# Altium PCB PCB1.pcbdoc (part 2 of 2)
Units mil, origin at the board's own origin, x right, y up, seen from the top; angles counter-clockwise.
Board outline 4560 x 3575 mil, 4 copper layers (Top Layer, GND, Inner2, Bottom Layer); 136 components, 94 nets, 575 pads, 341 vias.
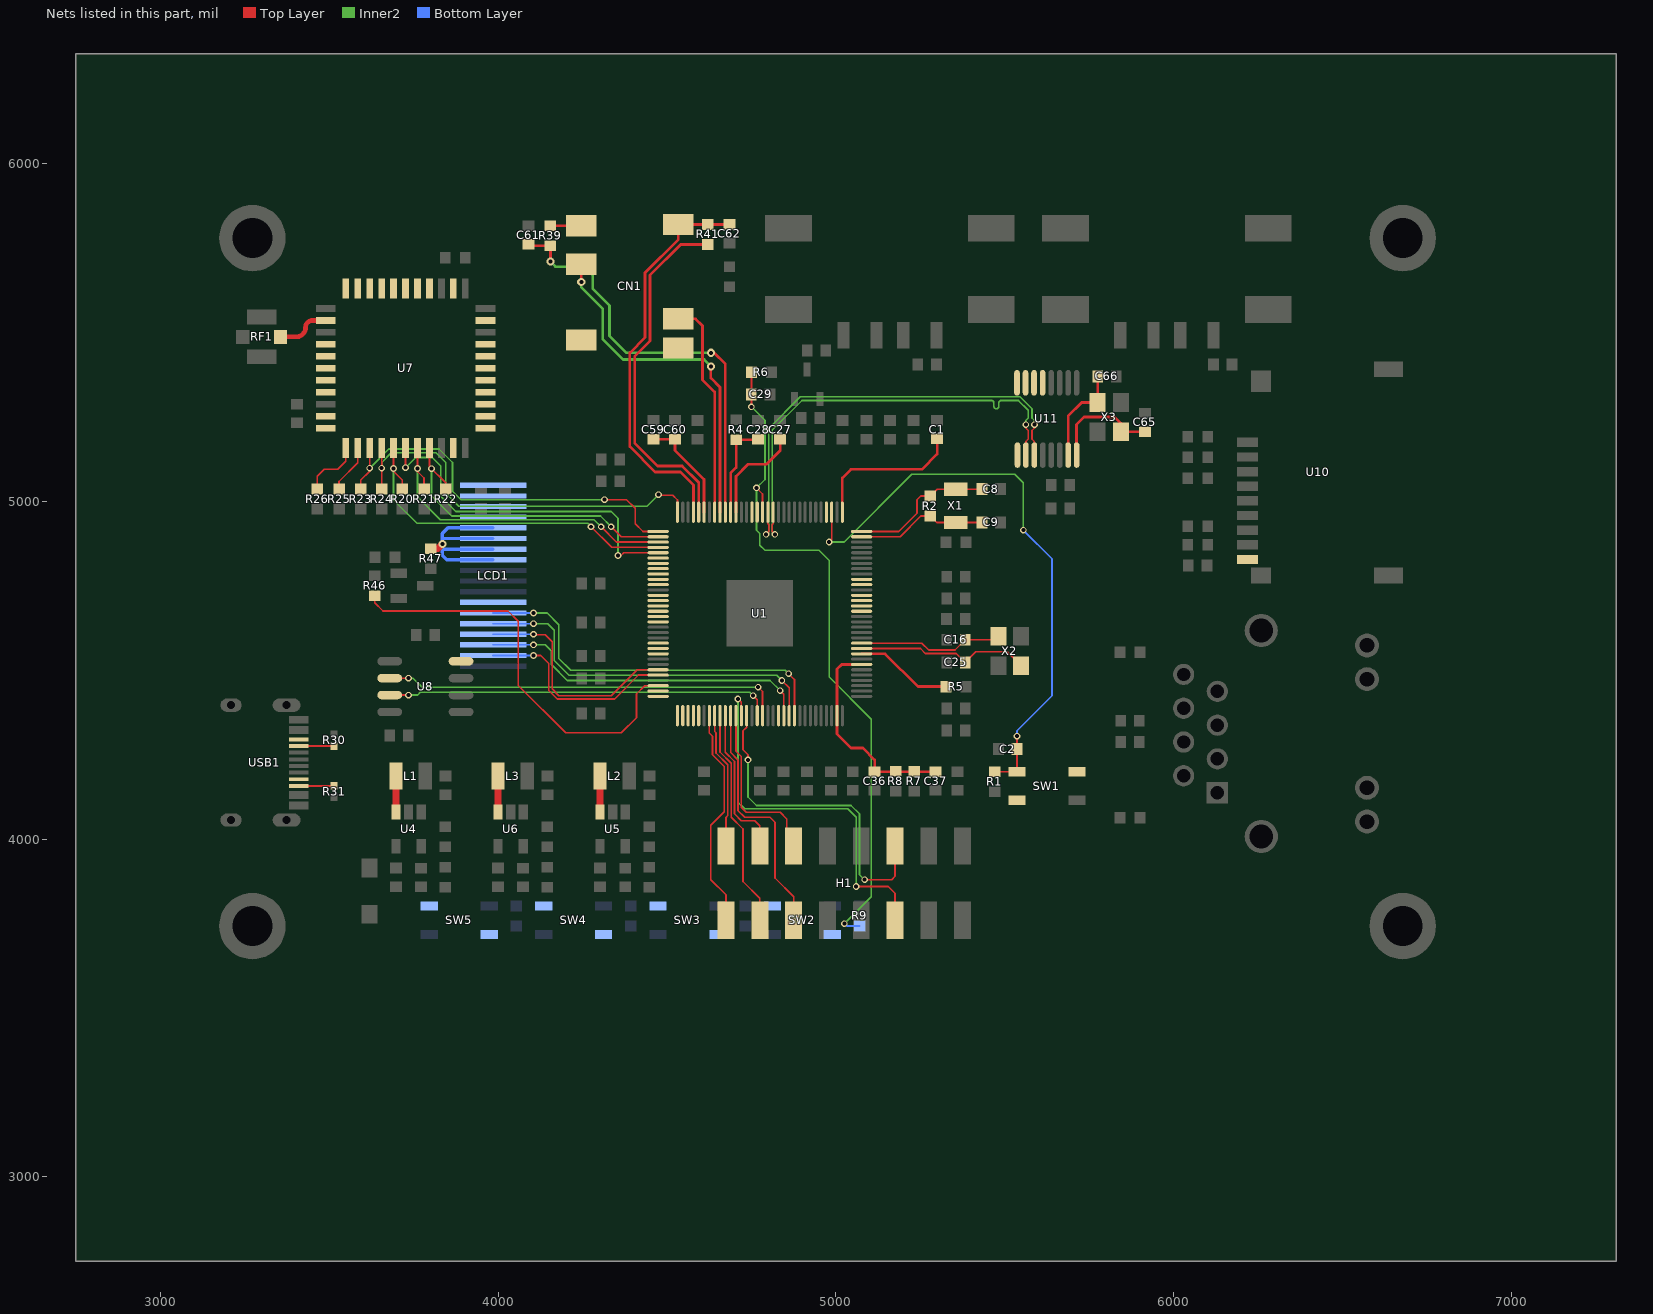
[diagram p4: the nets of this part, all layers, seen from the top]

## Via types
v1: diameter 24.02, hole 12.01, Top Layer to Bottom Layer, 200 vias
v2: diameter 24, hole 12, Top Layer to Bottom Layer, 60 vias
v3: diameter 19.68, hole 11.81, Top Layer to Bottom Layer, 41 vias
v4: diameter 19.7, hole 11.81, Top Layer to Bottom Layer, 31 vias
v5: diameter 27.56, hole 13.78, Top Layer to Bottom Layer, 9 vias

## Nets (pads, with @x,y where several pads share a name; then routed paths per layer and width w, separated by ;. In a path a pad name is that pad's centre, name@x,y a point inside that pad or via, vN(x,y) a via of type N, cw(c..) or ccw(c..) an arc to the next point about the centre after c; other vN are vias at no path point) (continued)
HBIAS: C61.2 R39.2 U1.119 | length 1271.9
  Top Layer w8: C61.2@4090,5761.02 4094.2,5756.82 R39.2@4155,5756.82 v1(4155,5710) ; v1(4630,5440) 4640,5440 4672.73,5407.27 U1.119@4672.73,4968.22
  Inner2 w8: v1(4155,5710) 4170,5695 4255,5695 4280,5670 4280,5630 4330,5580 4330,5490 4380,5440 v1(4630,5440)
HP_COM: C62.1 CN1.3 R41.1 U1.125 | length 1184.6
  Top Layer w8: U1.125@4578.24,4968.22 4578.24,5048.76 4540,5087.01 4465,5087.01 4390,5162.01 4390,5440 4435,5485 4435,5676.97 4533.7,5775.67 CN1.3@4533.7,5820.08 R41.1@4620,5820.08 C62.1@4685,5820.08
HP_COMFB: R41.2 U1.124 | length 1049.1
  Top Layer w8: U1.124@4593.99,4968.22 4593.99,5056.01 4545,5105 4472.01,5105 4405,5172.01 4405,5430 4450,5475 4450,5670 4540.76,5760.76 R41.2@4620,5760.76
HP_L: CN1.5 U1.121 | length 646.6
  Top Layer w8: CN1.5@4533.7,5540.55 4584.45,5540.55 4605,5520 4605,5360 4641.24,5323.76 U1.121@4641.24,4968.22
HP_R: CN1.4 U1.120 | length 1044.4
  Top Layer w8: v1(4246.3,5650) CN1.4@4246.3,5701.97 ; v1(4630,5400) 4630,5365 4656.98,5338.02 U1.120@4656.98,4968.22
  Inner2 w8: v1(4246.3,5650) 4246.3,5633.7 4310,5570 4310,5480 4370,5420 4610,5420 v1(4630,5400)
HS_MIC: CN1.2 R39.1 | length 91.3
  Top Layer w8: R39.1@4155,5816.14 CN1.2@4246.3,5816.14
HUB_XI: C65.2 U11.16 X3.1 | length 334.7
  Top Layer w8: U11.16@5712.66,5137.25 5712.66,5227.66 5735,5250 5825,5250 5843.92,5231.08 X3.1@5843.92,5206.27 C65.2@5915,5206.27
HUB_XO: C66.1 U11.15 X3.3 | length 296.5
  Top Layer w8: U11.15@5687.66,5137.25 5687.66,5252.66 5727.89,5292.89 X3.3@5775.02,5292.89 C66.1@5775.02,5370
KEYADC0: C29.1 R6.2 R9.1 U1.112 | length 2053.9
  Top Layer w5: v3(4750,5280) C29.1@4750,5317.01 R6.2@4750,5382.01 ; v3(4765,5040) 4782.97,5022.03 U1.112@4782.97,4968.22
  Inner2 w5: v3(4750,5280) 4790,5240 4790,5065 v3(4765,5040) 4765,4915 4775,4905 4775,4870 4790,4855 4950,4855 4980,4825 4980,4480 5105,4355 5105,3830 v3(5025,3750)
  Bottom Layer w5: v3(5025,3750) 5031.99,3743.01 R9.1@5070.16,3743.01
LEDK: LCD1.11 LCD1.12 LCD1.13 LCD1.14 R47.2 | length 718.8
  Top Layer w20: R47.2@3800,4859.66 3820.38,4859.66 v1(3835,4874.28)
  Bottom Layer w10: LCD1.11@3985,4827.24 3847.76,4827.24 3835,4840 3835,4858.99 ; LCD1.12@3985,4858.73 3835.26,4858.73 3835,4858.99 ; LCD1.13@3985,4890.23 3835.92,4890.23 3835,4889.31 ; LCD1.14@3985,4921.73 3851.73,4921.73 3835,4905 3835,4889.31 ; 3835,4858.99 v1(3835,4874.28) 3835,4889.31
LX: L1.2 U4.3 | length 106.4
  Top Layer w20: U4.3@3697.56,4080.62 L1.2@3697.56,4187.01
LX1: L2.2 U5.3 | length 106.4
  Top Layer w20: U5.3@4301.69,4080.62 L2.2@4301.69,4187.01
LX2: L3.2 U6.3 | length 106.4
  Top Layer w20: U6.3@3999.63,4080.62 L3.2@3999.63,4187.01
OTG1_CC1: R30.1 USB1.A5 | length 104.7
  Top Layer w5: USB1.A5@3409.96,4275.87 R30.1@3514.66,4275.87
OTG1_CC2: R31.1 USB1.B5 | length 104.7
  Top Layer w5: USB1.B5@3409.96,4157.77 R31.1@3514.66,4157.77
PB0: H1.1 U1.39 | length 659.7
  Top Layer w5: U1.39@4625.49,4365.8 4625.49,4314.51 4635,4305 4635,4250 4670,4215 4670,4081.48 4630,4041.48 4630,3880 4675,3835 H1.1@4675,3759.76
PB1: H1.2 U1.40 | length 403.7
  Top Layer w5: U1.40@4641.24,4365.8 4641.24,4318.76 4645,4315 4645,4255 4680,4220 4680,4070 4675,4065 H1.2@4675,3980.24
PB2: H1.3 U1.41 | length 654.9
  Top Layer w5: U1.41@4656.98,4365.8 4656.98,4258.02 4690,4225 4690,4065 4725,4030 4725,3875 4775,3825 H1.3@4775,3759.76
PB3: H1.4 U1.42 | length 451.4
  Top Layer w5: U1.42@4672.73,4365.8 4672.73,4257.27 4700,4230 4700,4075 4720,4055 4760,4055 4775,4040 H1.4@4775,3980.24
PB4: H1.5 U1.43 | length 727.2
  Top Layer w5: U1.43@4688.48,4365.8 4688.48,4256.52 4710,4235 4710,4085 4730,4065 4805,4065 4820,4050 4820,3885 4875,3830 H1.5@4875,3759.76
PB5: H1.6 U1.44 | length 514.9
  Top Layer w5: U1.44@4704.23,4365.8 4704.23,4260.77 4720,4245 4720,4095 4735,4080 4835,4080 4855,4060 4855,4000.24 H1.6@4875,3980.24
PB6: H1.11 U1.45 | length 1135.5
  Top Layer w5: v4(4710,4415) 4719.98,4405.02 U1.45@4719.98,4365.8 ; v3(5060,3860) 5155,3860 5175,3840 H1.11@5175,3759.76
  Inner2 w5: v4(4710,4415) 4710,4110 4730,4090 5035,4090 5060,4065 v3(5060,3860)
PB7: H1.12 U1.46 | length 987.8
  Top Layer w5: U1.46@4735.72,4365.8 4735.72,4331.8 4725,4321.07 4725,4265 4740,4250 v4(4740,4235) ; v3(5085,3880) 5165,3880 5175,3890 H1.12@5175,3980.24
  Inner2 w5: v4(4740,4235) 4740,4125 4765,4100 5045,4100 5070,4075 5070,3895 v3(5085,3880)
PE7: R46.1 U1.30 | length 1228.7
  Top Layer w5: R46.1@3635,4720.34 3635,4700 3659.49,4675.51 4029.49,4675.51 4060,4645 4060,4455 4200,4315 4365,4315 4410,4360 4410,4430 4434.41,4454.41 U1.30@4473.88,4454.41
PE8: LCD1.2 U1.28 | length 618.5
  Top Layer w5: v3(4105,4543.78) 4126.22,4543.78 4150,4520 4150,4440 4175,4415 4345,4415 4415.91,4485.91 U1.28@4473.88,4485.91
  Bottom Layer w5: LCD1.2@3985,4543.78 v3(4105,4543.78)
PE9: LCD1.4 U1.27 | length 679
  Top Layer w5: v3(4105,4606.77) 4105,4605 4140,4605 4160,4585 4160,4445 4180,4425 4335,4425 4411.65,4501.65 U1.27@4473.88,4501.65
  Bottom Layer w5: LCD1.4@3985,4606.77 v3(4105,4606.77)
RESET: C2.2 R1.1 SW1.1 U1.99 | length 1759.6
  Top Layer w5: v3(4980,4880) 4987.69,4887.69 U1.99@4987.69,4968.22 ; R1.1@5470,4199.57 SW1.1@5536.42,4199.57 C2.2@5536.42,4267.01 v3(5536.42,4305)
  Inner2 w5: v3(4980,4880) 5025,4880 5225,5080 5530,5080 5555,5055 v3(5555,4915)
  Bottom Layer w5: v3(5536.42,4305) 5536.42,4321.42 5640,4425 5640,4830 v3(5555,4915)
RTC_VIO: C1.1 U1.97 | length 456.2
  Top Layer w8: U1.97@5019.19,4968.22 5019.19,5069.19 5045,5095 5255,5095 5300,5140 C1.1@5300,5185.06
SPI_CS: LCD1.5 U1.54 | length 1090.6
  Top Layer w5: v3(4840,4470) 4861.71,4448.29 U1.54@4861.71,4365.8
  Inner2 w5: v3(4105,4638.26) 4146.74,4638.26 4166,4619 4166,4529 4210,4485 4825,4485 v3(4840,4470)
  Bottom Layer w5: LCD1.5@3985,4638.26 v3(4105,4638.26)
SPI_MOSI: LCD1.6 U1.55 | length 1139.8
  Top Layer w5: v3(4860,4490) 4877.46,4472.54 U1.55@4877.46,4365.8
  Inner2 w5: v3(4105,4669.76) 4145.24,4669.76 ; 4145,4670 4145.24,4669.76 ; v3(4860,4490) 4850,4500 4215,4500 4180,4535 4180,4635 4145.24,4669.76
  Bottom Layer w5: LCD1.6@3985,4669.76 v3(4105,4669.76)
SPI_SCK: LCD1.3 U1.53 | length 1008.5
  Top Layer w5: v3(4835,4440) 4845.96,4429.04 U1.53@4845.96,4365.8
  Inner2 w5: v3(4105,4575.27) 4139.73,4575.27 4157,4558 4157,4517.54 4204.54,4470 4805,4470 v3(4835,4440)
  Bottom Layer w5: LCD1.3@3985,4575.27 v3(4105,4575.27)
SVREF: C36.2 C37.2 R7.1 R8.2 U1.63 U1.71 | length 629.2
  Top Layer w8: U1.71@5076.31,4517.4 5017.4,4517.4 5003.44,4503.44 U1.63@5003.44,4365.8 5003.44,4311.56 5045,4270 5080,4270 5115,4235 C36.2@5115,4199.57 C37.2@5295,4199.57
SZQ: R5.1 U1.73 | length 289.9
  Top Layer w8: U1.73@5076.31,4548.9 5146.1,4548.9 5242.99,4452.01 R5.1@5326.07,4452.01
UART0_RX: U1.49 U8.6 | length 1191.6
  Top Layer w5: U8.6@3679.05,4476.67 v3(3735,4476.67) ; v4(4770,4450) 4782.97,4437.03 U1.49@4782.97,4365.8
  Inner2 w5: v3(3735,4476.67) 3748.33,4476.67 3775,4450 v4(4770,4450)
UART0_TX: U1.48 U8.7 | length 1147.8
  Top Layer w5: U8.7@3679.05,4426.67 v3(3735,4426.67) ; v3(4755,4425) 4767.22,4412.78 U1.48@4767.22,4365.8
  Inner2 w5: v3(3735,4426.67) 3761.67,4426.67 3770,4435 4745,4435 v3(4755,4425)
USB_N: U1.110 U11.10 | length 1365.4
  Top Layer w5: U1.110@4814.46,4968.22 4814.46,4934.22 4812.09,4931.85 4812.09,4910 v3(4819.43,4902.67) ; v4(5562.31,5227.2) 5562.31,5217.35 5569.66,5210 5569.66,5184.57 5562.66,5177.57 U11.10@5562.66,5137.25
  Inner2 w5: v3(4819.43,4902.67) 4812.09,4910 4812.09,5211.53 4899.56,5299 5460.03,5299 cw(c5460.03,5291.5) 5467.53,5291.5 5467.53,5281.81 ccw(c5475.03,5281.81) 5482.53,5281.81 5482.53,5291.5 cw(c5490.03,5291.5) 5490.03,5299 5540.44,5299 5569.66,5269.78 5569.66,5246.9 5562.31,5239.55 v4(5562.31,5227.2)
USB_P: U1.111 U11.11 | length 1365.4
  Top Layer w5: v3(4793.76,4902.67) 4801.09,4910 4801.09,4931.85 4798.72,4934.22 U1.111@4798.72,4968.22 ; U11.11@5587.66,5137.25 5587.66,5177.57 5580.66,5184.57 5580.66,5210 5588.01,5217.35 v4(5588.01,5227.2)
  Inner2 w5: v3(4793.76,4902.67) 4801.09,4910 4801.09,5216.09 4895,5310 5545,5310 5580.66,5274.34 5580.66,5246.9 5588.01,5239.55 v4(5588.01,5227.2)
VHP_BP: C59.2 C60.2 U1.123 | length 315.6
  Top Layer w8: C59.2@4460,5184.45 C60.2@4523.79,5184.45 4523.79,5151.21 4609.74,5065.26 U1.123@4609.74,4968.22
VRA1: C27.2 U1.117 | length 302.6
  Top Layer w8: U1.117@4704.23,4968.22 4704.23,5074.23 4740,5110 4795,5110 4835,5150 C27.2@4835,5184.45
VRA2: C28.2 R4.2 U1.118 | length 282
  Top Layer w8: U1.118@4688.48,4968.22 4688.48,5083.48 4705,5100 R4.2@4705,5182.65 4763.2,5182.65 C28.2@4765,5184.45
WIFI_SDC_CLK: U1.5 U7.17 | length 1058.7
  Top Layer w5: v3(3726,5100) U7.17@3726,5157.79 ; v3(4355,4840) 4363.78,4840 4371.89,4848.11 U1.5@4473.88,4848.11
  Inner2 w5: v3(3726,5100) 3756,5130 3805,5130 3830,5105 3830,5015 3875,4970 4335,4970 4355,4950 v3(4355,4840)
WIFI_SDC_CMD: R20.1 U1.4 U7.16 | length 1066.7
  Top Layer w5: U7.16@3690.57,5157.79 3690.57,5089.43 3716.67,5063.33 R20.1@3716.67,5036.67 ; v3(4275,4925) 4336.14,4863.86 U1.4@4473.88,4863.86
  Inner2 w5: v4(3690.57,5097.62) 3690.57,5004.43 3760,4935 4265,4935 v3(4275,4925)
WIFI_SDC_D0: R21.1 U1.3 U7.18 | length 981.1
  Top Layer w5: U7.18@3761.43,5157.79 3761.43,5088.57 3780.83,5069.17 R21.1@3780.83,5036.67 ; v3(4305,4925) 4350.39,4879.61 U1.3@4473.88,4879.61
  Inner2 w5: v4(3761.43,5097.62) 3761.43,5013.57 3829,4946 4284,4946 v3(4305,4925)
WIFI_SDC_D1: R22.1 U1.2 U7.19 | length 942.6
  Top Layer w5: U7.19@3796.87,5157.79 3796.87,5103.13 3845,5055 R22.1@3845,5036.67 ; v3(4335,4925) 4364.65,4895.35 U1.2@4473.88,4895.35
  Inner2 w5: v4(3802.82,5097.18) 3802.82,5017.18 3863,4957 4303,4957 v3(4335,4925)
WIFI_SDC_D2: R23.1 U1.1 U7.14 | length 1186.8
  Top Layer w5: R23.1@3593.33,5036.67 3593.33,5063.33 3619.7,5089.7 U7.14@3619.7,5157.79 ; v3(4315,5005) 4379.98,5005 4405.64,4979.35 4405.64,4934.36 4428.9,4911.1 U1.1@4473.88,4911.1
  Inner2 w5: v4(3619.7,5098.59) 3676.11,5155 3825,5155 3865,5115 3865,5030 3890,5005 v3(4315,5005)
WIFI_SDC_D3: R24.1 U1.128 U7.15 | length 1200.1
  Top Layer w5: R24.1@3655.13,5036.67 v4(3655.13,5098.59) U7.15@3655.13,5157.79 ; v3(4475,5020) 4476.67,5018.33 4516.67,5018.33 4531,5004 U1.128@4531,4968.22
  Inner2 w5: v4(3655.13,5098.59) 3655.13,5115.13 3684,5144 3816,5144 3845,5115 3845,5025 3884,4986 4441,4986 v3(4475,5020)
WL_H_WK: R25.1 U7.13 | length 143.9
  Top Layer w5: R25.1@3529.17,5036.67 3529.17,5059.17 3584.27,5114.27 U7.13@3584.27,5157.79
WL_LNA: RF1.4 U7.2 | length 161.5
  Top Layer w13.75: RF1.4@3356.1,5487.01 3402.01,5487.01 ccw(c3402.01,5515) 3430,5515 cw(c3450.74,5515) 3450.74,5535.74 U7.2@3489.78,5535.74
WL_REG: R26.1 U7.12 | length 179.3
  Top Layer w5: R26.1@3465,5036.67 3465,5075 3485,5095 3525,5095 3548.83,5118.83 U7.12@3548.83,5157.79
X24MIN: C16.1 U1.75 X2.3 | length 430.4
  Top Layer w5: U1.75@5076.31,4580.39 5254.61,4580.39 5275,4560 5352.51,4560 C16.1@5382.99,4590.47 5471.69,4590.47 X2.3@5481.53,4600.32
X24MOUT: C25.1 U1.74 X2.1 | length 519.3
  Top Layer w5: U1.74@5076.31,4564.65 5250.35,4564.65 5265,4550 5356.53,4550 C25.1@5382.99,4523.54 5414.44,4555 5507.16,4555 X2.1@5548.47,4513.7
X32KIN: C8.2 R2.2 U1.96 X1.2 | length 431.4
  Top Layer w5: U1.96@5076.31,4911.1 5186.1,4911.1 5240,4965 5240,5005 5250.94,5015.94 R2.2@5280,5015.94 5300.29,5036.22 X1.2@5355.01,5036.22 C8.2@5432.44,5036.22
X32KOUT: C9.2 R2.1 U1.95 X1.1 | length 389.3
  Top Layer w5: U1.95@5076.31,4895.35 5190.35,4895.35 5251.62,4956.62 R2.1@5280,4956.62 5298.82,4937.79 X1.1@5355.01,4937.79 C9.2@5432.44,4937.79
"": CN1.6 CN1.7 LCD1.7 LCD1.15 LCD1.16 LCD1.17 LCD1.18 SW1.2 SW1.3 SW2.2 SW2.3 SW3.2 SW3.3 SW4.2 SW4.3 SW5.2 SW5.3 U1.6 U1.7 U1.8 U1.9 U1.10 U1.11 U1.13 U1.14 U1.15 U1.16 U1.17 U1.18 U1.22 U1.23 U1.24 U1.31 U1.32 U1.33 U1.34 U1.35 U1.36 U1.37 U1.52 U1.81 U1.82 U1.83 U1.84 U1.86 U1.87 U1.100 U1.113 U1.114 U7.4 U7.5 U7.6 U7.7 U7.8 U7.10 U7.11 U7.21 U7.23 U7.24 U7.25 U7.26 U7.27 U7.28 U7.29 U7.30 U7.32 U7.35 U7.37 U7.38 U7.39 U7.40 U7.41 U7.42 U7.43 U7.44 U8.4 U10.CD U11.5 U11.6 U11.7 U11.8 U11.9 USB1.A8 USB1.B8

## Polygon pours and split planes (outlines as drawn)
GND on Top Layer (solid, remove dead copper, pour order 0): 3000,3150 6915,3150 6915,6075 3000,6075
GND on Inner2 (solid, remove dead copper, pour order 1): 3060,3000 7060,3000 7060,5985 3060,5985
GND on Bottom Layer (solid, remove dead copper, pour order 2): 3100,3195 6860,3195 6860,5945 3100,5945
GND on GND (split plane): 3233.43,3614.94 cw(c3189.26,3659.11) 3145.1,3703.27 3145.1,5818.58 cw(c3189.26,5862.75) 3233.43,5906.91 6717.68,5906.91 cw(c6761.84,5862.75) 6806,5818.58 6806,3703.27 cw(c6761.84,3659.11) 6717.68,3614.94 3233.43,3614.94
GND on GND (split plane): 3204.36,4396.77 3204.36,4426.67 3214.36,4426.67 3214.36,4396.77
GND on GND (split plane): 3214.36,4396.77 3214.36,4366.87 3204.36,4366.87 3204.36,4396.77
GND on GND (split plane): 3209.36,4401.77 3251.06,4401.77 3251.06,4391.77 3209.36,4391.77
GND on GND (split plane): 3167.66,4401.77 3209.36,4401.77 3209.36,4391.77 3167.66,4391.77
GND on GND (split plane): 3368.96,4056.57 3368.96,4086.47 3378.96,4086.47 3378.96,4056.57
GND on GND (split plane): 3378.96,4056.57 3378.96,4026.67 3368.96,4026.67 3368.96,4056.57
GND on GND (split plane): 3373.96,4061.57 3425.51,4061.57 3425.51,4051.57 3373.96,4051.57
GND on GND (split plane): 3322.41,4061.57 3373.96,4061.57 3373.96,4051.57 3322.41,4051.57
GND on GND (split plane): 3204.36,4056.57 3204.36,4086.47 3214.36,4086.47 3214.36,4056.57
GND on GND (split plane): 3214.36,4056.57 3214.36,4026.67 3204.36,4026.67 3204.36,4056.57
GND on GND (split plane): 3209.36,4061.57 3251.06,4061.57 3251.06,4051.57 3209.36,4051.57
GND on GND (split plane): 3167.66,4061.57 3209.36,4061.57 3209.36,4051.57 3167.66,4051.57
GND on GND (split plane): 3368.96,4396.77 3368.96,4426.67 3378.96,4426.67 3378.96,4396.77
GND on GND (split plane): 3378.96,4396.77 3378.96,4366.87 3368.96,4366.87 3368.96,4396.77
GND on GND (split plane): 3373.96,4401.77 3425.51,4401.77 3425.51,4391.77 3373.96,4391.77
GND on GND (split plane): 3322.41,4401.77 3373.96,4401.77 3373.96,4391.77 3322.41,4391.77
GND on GND (split plane): 6034.48,4487.74 6034.48,4446.05 6024.48,4446.05 6024.48,4487.74
GND on GND (split plane): 6024.48,4487.74 6024.48,4529.44 6034.48,4529.44 6034.48,4487.74
GND on GND (split plane): 5987.78,4492.74 6029.48,4492.74 6029.48,4482.74 5987.78,4482.74
GND on GND (split plane): 6029.48,4492.74 6071.18,4492.74 6071.18,4482.74 6029.48,4482.74
GND on GND (split plane): 6134.48,4437.74 6134.48,4396.05 6124.48,4396.05 6124.48,4437.74
GND on GND (split plane): 6124.48,4437.74 6124.48,4479.44 6134.48,4479.44 6134.48,4437.74
GND on GND (split plane): 6087.78,4442.74 6129.48,4442.74 6129.48,4432.74 6087.78,4432.74
GND on GND (split plane): 6129.48,4442.74 6171.18,4442.74 6171.18,4432.74 6129.48,4432.74
GND on GND (split plane): 6264.4,4617.86 6264.4,4558.45 6254.4,4558.45 6254.4,4617.86
GND on GND (split plane): 6254.4,4617.86 6254.4,4677.28 6264.4,4677.28 6264.4,4617.86
GND on GND (split plane): 6199.99,4622.86 6259.4,4622.86 6259.4,4612.86 6199.99,4612.86
GND on GND (split plane): 6259.4,4622.86 6318.81,4622.86 6318.81,4612.86 6259.4,4612.86
GND on GND (split plane): 6254.4,3948.61 6254.4,4008.02 6264.4,4008.02 6264.4,3948.61
GND on GND (split plane): 6264.4,4067.44 6264.4,4008.02 6254.4,4008.02 6254.4,4067.44
GND on GND (split plane): 6199.99,4013.02 6259.4,4013.02 6259.4,4003.02 6199.99,4003.02
GND on GND (split plane): 6259.4,4013.02 6318.81,4013.02 6318.81,4003.02 6259.4,4003.02

## Keep-outs
Top Layer:
  region net "": 3675,4145 3805,4145 3805,4230 3675,4230
  region net "": 3980,4145 4105,4145 4105,4230 3980,4230
  region net "": 4280,4145 4410,4145 4410,4230 4280,4230
Board Outline Layer:
  lines w10 net "": 3135,3703.27 ccw(c3233.43,3703.27) 3233.43,3604.84 6717.68,3604.84 ccw(c6717.68,3703.27) 6816.1,3703.27 6816.1,5818.58 ccw(c6717.68,5818.58) 6717.68,5917.01 3233.43,5917.01 ccw(c3233.43,5818.58) 3135,5818.58 3135,3703.27

## Other copper
Top Layer:
  drawing of 574 lines, arcs and shapes, not listed
Inner2:
  drawing of 63 lines, arcs and shapes, not listed
Bottom Layer:
  region net $1N5958: 4986.94,3781.05 4991.94,3781.05 cw(c5001.31,3781.05) 4995.69,3788.55 4983.19,3788.55 cw(c4977.56,3781.05)
  region net $1N5958: 5022.53,3799.82 5022.53,3804.82 cw(c5022.53,3814.2) 5015.03,3808.57 5015.03,3796.07 cw(c5022.53,3790.45)
  region net $1N5967: 4683.91,3799.82 4683.91,3804.82 cw(c4683.91,3814.2) 4676.41,3808.57 4676.41,3796.07 cw(c4683.91,3790.45)
  region net $1N15779: 4309.7,3782.2 4314.7,3782.2 cw(c4321.94,3782.2) 4318.45,3788.55 4305.95,3788.55 cw(c4302.46,3782.2)
  region net $1N15779: 4345.29,3799.82 4345.29,3804.82 cw(c4345.29,3814.2) 4337.79,3808.57 4337.79,3796.07 cw(c4345.29,3790.45)
  region net $1N5958: 5045.66,3804.82 5045.66,3799.82 cw(c5045.66,3790.45) 5053.16,3796.07 5053.16,3808.57 cw(c5045.66,3814.2)
  region net KEYADC0: 5045.66,3745.51 5045.66,3740.51 cw(c5045.66,3731.13) 5053.16,3736.76 5053.16,3749.26 cw(c5045.66,3754.88)
  region net $1N5967: 4707.04,3804.82 4707.04,3799.82 cw(c4707.04,3790.45) 4714.54,3796.07 4714.54,3808.57 cw(c4707.04,3814.2)
  region net $1N5958: 4756.05,3740.51 4756.05,3745.51 cw(c4756.05,3754.88) 4748.55,3749.26 4748.55,3736.76 cw(c4756.05,3731.13)
  region net $1N15779: 4368.42,3804.82 4368.42,3799.82 cw(c4368.42,3790.45) 4375.92,3796.07 4375.92,3808.57 cw(c4368.42,3814.2)
  region net $1N5967: 4417.44,3740.51 4417.44,3745.51 cw(c4417.44,3754.88) 4409.94,3749.26 4409.94,3736.76 cw(c4417.44,3731.13)
  region net $1N15784: 4029.8,3804.82 4029.8,3799.82 cw(c4029.8,3790.45) 4037.3,3796.07 4037.3,3808.57 cw(c4029.8,3814.2)
  region net $1N15779: 4078.82,3740.51 4078.82,3745.51 cw(c4078.82,3754.88) 4071.32,3749.26 4071.32,3736.76 cw(c4078.82,3731.13)
  region net $1N15784: 4006.67,3799.82 4006.67,3804.82 cw(c4006.67,3814.2) 3999.17,3808.57 3999.17,3796.07 cw(c4006.67,3790.45)
  region net SPI_SCK: 4090.93,4572.77 4090.93,4577.77 cw(c4090.93,4587.15) 4083.43,4581.52 4083.43,4569.02 cw(c4090.93,4563.4)
  region net LEDK: 3871.57,4926.73 3871.57,4916.73 cw(c3871.57,4876.15) 3886.57,4913.86 3886.57,4929.6 cw(c3871.57,4967.31)
  region net PE8: 4090.93,4541.28 4090.93,4546.28 cw(c4090.93,4555.65) 4083.43,4550.03 4083.43,4537.53 cw(c4090.93,4531.9)
  region net 3V3: 3871.57,4769.24 3871.57,4759.24 cw(c3871.57,4718.66) 3886.57,4756.37 3886.57,4772.11 cw(c3871.57,4809.82)
  region net SPI_CS: 4090.93,4635.76 4090.93,4640.76 cw(c4090.93,4650.14) 4083.43,4644.51 4083.43,4632.01 cw(c4090.93,4626.39)
  region net LEDK: 3871.57,4895.23 3871.57,4885.23 cw(c3871.57,4778.04) 3886.57,4884.18 3886.57,4896.28 cw(c3871.57,5002.42)
  region net PE9: 4090.93,4604.27 4090.93,4609.27 cw(c4090.93,4618.65) 4083.43,4613.02 4083.43,4600.52 cw(c4090.93,4594.9)
  region net 3V3: 3880.74,4800.74 3880.74,4790.74 cw(c3880.74,4774.07) 3886.57,4789.69 3886.57,4801.79 cw(c3880.74,4817.41)
  region net SPI_MOSI: 4090.93,4667.26 4090.93,4672.26 cw(c4090.93,4681.64) 4083.43,4676.01 4083.43,4663.51 cw(c4090.93,4657.89)
  region net LEDK: 3871.57,4863.73 3871.57,4853.73 cw(c3871.57,4746.54) 3886.57,4852.68 3886.57,4864.78 cw(c3871.57,4970.92)
  region net LEDK: 3871.57,4832.24 3871.57,4822.24 cw(c3871.57,4715.05) 3886.57,4821.19 3886.57,4833.29 cw(c3871.57,4939.43)
  region net 3V3: 6545.35,4093.29 6531.21,4079.15 6532.37,4077.91 6533.38,4076.68 6533.97,4075.86 6534.5,4075.05 6534.97,4074.23 6535.38,4073.42 6535.74,4072.6 6536.06,4071.78 6536.44,4070.55 6536.74,4069.3 6536.95,4068.04 6537.09,4066.76 6537.18,4065.01 6537.16,4061.85 6536.91,4053.84 6536.99,4050.48 6537.03,4049.89 6574.61,4087.48 6571.21,4087.59 6563.59,4087.37 6559.93,4087.31 6558.18,4087.38 6556.89,4087.5 6555.62,4087.69 6554.37,4087.95 6553.13,4088.31 6552.31,4088.6 6551.49,4088.93 6550.68,4089.32 6549.86,4089.76 6549.05,4090.26 6548.23,4090.82 6547,4091.78 6545.77,4092.89
  region net 3V3: 6531.21,4546.73 6545.35,4532.59 6546.59,4533.76 6547.82,4534.76 6548.64,4535.35 6549.45,4535.88 6550.27,4536.35 6551.08,4536.77 6551.9,4537.13 6552.72,4537.44 6553.96,4537.83 6555.2,4538.12 6556.47,4538.33 6557.75,4538.47 6559.49,4538.56 6562.65,4538.55 6570.66,4538.29 6574.03,4538.38 6574.61,4538.41 6537.03,4575.99 6536.91,4572.59 6537.13,4564.97 6537.19,4561.31 6537.12,4559.56 6537,4558.27 6536.81,4557.01 6536.55,4555.75 6536.2,4554.51 6535.91,4553.69 6535.57,4552.88 6535.18,4552.06 6534.74,4551.24 6534.24,4550.43 6533.68,4549.61 6532.73,4548.38 6531.61,4547.15
  region net 3V3: 6582.39,4622.01 6562.39,4622.01 6562.34,4620.31 6562.18,4618.73 6562.02,4617.74 6561.81,4616.78 6561.57,4615.88 6561.29,4615.01 6560.97,4614.17 6560.61,4613.37 6560.01,4612.23 6559.33,4611.14 6558.59,4610.09 6557.78,4609.09 6556.62,4607.79 6554.37,4605.57 6548.52,4600.08 6546.2,4597.65 6545.82,4597.21 6598.96,4597.21 6596.64,4599.69 6591.1,4604.93 6588.47,4607.47 6587.28,4608.76 6586.45,4609.76 6585.69,4610.78 6584.99,4611.86 6584.36,4612.98 6583.99,4613.77 6583.65,4614.59 6583.35,4615.44 6583.08,4616.33 6582.86,4617.25 6582.68,4618.23 6582.49,4619.77 6582.4,4621.43
  region net 3V3: 3890,4158.66 3900,4158.66 3900.02,4159.23 3900.09,4159.8 3900.2,4160.37 3900.34,4160.93 3900.52,4161.49 3900.98,4162.6 3901.54,4163.68 3902.19,4164.72 3902.89,4165.7 3904,4167.06 3886,4167.06 3887.11,4165.7 3887.81,4164.72 3888.46,4163.68 3889.02,4162.6 3889.48,4161.49 3889.66,4160.93 3889.8,4160.37 3889.91,4159.8 3889.98,4159.23
  region net 3V3: 3898.54,3866.46 3891.46,3873.54 3891.06,3873.17 3890.66,3872.86 3890.26,3872.61 3889.86,3872.42 3889.45,3872.26 3889.04,3872.15 3888.62,3872.07 3888.19,3872.03 3887.29,3871.99 3884.8,3872 3884.25,3871.98 3896.98,3859.25 3897.01,3860.34 3897,3862.75 3897.03,3863.19 3897.07,3863.62 3897.15,3864.04 3897.26,3864.45 3897.42,3864.86 3897.61,3865.26 3897.86,3865.66 3898.17,3866.06
  region net 1V2: 4193.02,4171.92 4200.09,4178.99 4199.7,4179.41 4199.35,4179.86 4199.02,4180.34 4198.73,4180.84 4198.46,4181.36 4198,4182.47 4197.63,4183.63 4197.35,4184.82 4197.15,4186.01 4196.98,4187.76 4184.25,4175.03 4186,4174.86 4187.19,4174.66 4188.38,4174.38 4189.54,4174.01 4190.64,4173.55 4191.17,4173.28 4191.67,4172.98 4192.15,4172.66 4192.6,4172.31
  region net 1V2: 4203.54,3866.46 4196.46,3873.54 4196.06,3873.17 4195.66,3872.86 4195.26,3872.61 4194.86,3872.42 4194.45,3872.26 4194.04,3872.15 4193.62,3872.07 4193.19,3872.03 4192.29,3871.99 4189.8,3872 4189.25,3871.98 4201.98,3859.25 4202.01,3860.34 4202,3862.75 4202.03,3863.19 4202.07,3863.62 4202.15,3864.04 4202.26,3864.45 4202.42,3864.86 4202.61,3865.26 4202.86,3865.66 4203.17,3866.06
  region net 1V8: 4498.02,4171.92 4505.09,4178.99 4504.7,4179.41 4504.35,4179.86 4504.02,4180.34 4503.73,4180.84 4503.46,4181.36 4503,4182.47 4502.63,4183.63 4502.35,4184.82 4502.15,4186.01 4501.98,4187.76 4489.25,4175.03 4491,4174.86 4492.19,4174.66 4493.38,4174.38 4494.54,4174.01 4495.64,4173.55 4496.17,4173.28 4496.67,4172.98 4497.15,4172.66 4497.6,4172.31
  region net 1V8: 4505.09,3868.02 4498.02,3875.09 4497.6,3874.7 4497.15,3874.35 4496.67,3874.02 4496.17,3873.73 4495.64,3873.46 4494.54,3873 4493.38,3872.63 4492.19,3872.35 4491,3872.15 4489.25,3871.98 4501.98,3859.25 4502.15,3861 4502.35,3862.19 4502.63,3863.38 4503,3864.54 4503.46,3865.64 4503.73,3866.17 4504.02,3866.67 4504.35,3867.15 4504.7,3867.6
  region net 3V3: 4405,5040.95 4425,5040.95 4424.97,5041.76 4424.9,5042.52 4424.67,5043.88 4424.26,5045.65 4424.16,5046.19 4424.09,5046.72 4424.07,5047.24 4424.1,5047.76 4424.21,5048.29 4424.39,5048.83 4424.67,5049.39 4425.05,5049.98 4425.55,5050.59 4404.88,5050.59 4405.4,5049.95 4405.79,5049.35 4406.06,5048.78 4406.23,5048.25 4406.3,5047.73 4406.3,5047.23 4406.24,5046.72 4406.12,5046.22 4405.61,5044.57 4405.26,5043.3 4405.12,5042.58 4405.03,5041.8
  region net 3V3: 4425,5078.47 4405,5078.47 4405.03,5077.61 4405.12,5076.83 4405.26,5076.12 4405.61,5074.84 4406.12,5073.2 4406.24,5072.69 4406.3,5072.19 4406.3,5071.68 4406.23,5071.16 4406.06,5070.63 4405.79,5070.06 4405.4,5069.46 4404.88,5068.82 4425.55,5068.82 4425.05,5069.44 4424.67,5070.02 4424.39,5070.58 4424.21,5071.12 4424.1,5071.65 4424.07,5072.17 4424.09,5072.69 4424.16,5073.22 4424.53,5074.91 4424.8,5076.19 4424.9,5076.9 4424.97,5077.65
  region net 3V0: 5001.24,4600.14 5001.24,4592.14 5002.1,4592.11 5002.88,4592 5003.6,4591.83 5004.26,4591.6 5004.88,4591.31 5005.45,4590.97 5005.99,4590.59 5006.51,4590.16 5007.52,4589.2 5009.64,4586.99 5010.89,4585.81 5010.89,4606.48 5009.64,4605.29 5007.52,4603.08 5006.51,4602.12 5005.99,4601.7 5005.45,4601.31 5004.88,4600.97 5004.26,4600.69 5003.6,4600.45 5002.88,4600.28 5002.1,4600.18
  region net 3V0: 4741,4881.24 4749,4881.24 4749.04,4882.1 4749.14,4882.88 4749.31,4883.6 4749.54,4884.26 4749.83,4884.88 4750.17,4885.45 4750.55,4885.99 4750.98,4886.51 4751.94,4887.52 4754.15,4889.64 4755.33,4890.89 4734.67,4890.89 4735.85,4889.64 4738.06,4887.52 4739.02,4886.51 4739.45,4885.99 4739.83,4885.45 4740.17,4884.88 4740.46,4884.26 4740.69,4883.6 4740.86,4882.88 4740.96,4882.1
  region net 3V3: 4254.88,5085 4254.88,5105 4254.05,5104.97 4253.28,5104.89 4252.57,5104.77 4251.29,5104.46 4249.63,5104.02 4249.11,5103.93 4248.6,5103.88 4248.08,5103.9 4247.56,5103.99 4247.02,5104.17 4246.46,5104.44 4245.87,5104.83 4245.24,5105.33 4245.24,5084.67 4245.87,5085.17 4246.46,5085.56 4247.02,5085.83 4247.56,5086.01 4248.08,5086.1 4248.6,5086.12 4249.11,5086.07 4249.63,5085.98 4251.29,5085.54 4252.57,5085.23 4253.28,5085.11 4254.05,5085.03
  region net 1V2: 4341.24,5185 4341.24,5165 4342.07,5165.03 4342.84,5165.11 4343.55,5165.23 4344.83,5165.54 4346.5,5165.98 4347.02,5166.07 4347.53,5166.12 4348.04,5166.1 4348.56,5166.01 4349.1,5165.83 4349.66,5165.56 4350.26,5165.17 4350.89,5164.67 4350.89,5185.33 4350.26,5184.83 4349.66,5184.44 4349.1,5184.17 4348.56,5183.99 4348.04,5183.9 4347.53,5183.88 4347.02,5183.93 4346.5,5184.02 4344.83,5184.46 4343.55,5184.77 4342.84,5184.89 4342.07,5184.97
  region net 3V3: 5288.81,4795.34 5274.66,4781.19 5275.27,4780.63 5275.88,4780.14 5276.46,4779.72 5277.58,4779.04 5279.08,4778.17 5279.51,4777.87 5279.9,4777.54 5280.25,4777.16 5280.56,4776.73 5280.81,4776.22 5281.02,4775.63 5281.16,4774.94 5281.25,4774.14 5295.86,4788.75 5295.06,4788.84 5294.37,4788.98 5293.78,4789.19 5293.27,4789.44 5292.84,4789.75 5292.46,4790.1 5292.13,4790.49 5291.83,4790.92 5290.96,4792.42 5290.28,4793.54 5289.86,4794.12 5289.37,4794.73
  region net 1V2: 5026.24,4245 5026.24,4225 5027.07,4225.03 5027.84,4225.11 5028.55,4225.23 5029.83,4225.54 5031.5,4225.98 5032.02,4226.07 5032.53,4226.12 5033.04,4226.1 5033.56,4226.01 5034.1,4225.83 5034.66,4225.56 5035.26,4225.17 5035.89,4224.67 5035.89,4245.33 5035.26,4244.83 5034.66,4244.44 5034.1,4244.17 5033.56,4243.99 5033.04,4243.9 5032.53,4243.88 5032.02,4243.93 5031.5,4244.02 5029.83,4244.46 5028.55,4244.77 5027.84,4244.89 5027.07,4244.97
  region net 1V2: 5063.76,4225 5063.76,4245 5062.93,4244.97 5062.16,4244.89 5061.45,4244.77 5060.17,4244.46 5058.5,4244.02 5057.98,4243.93 5057.47,4243.88 5056.96,4243.9 5056.44,4243.99 5055.9,4244.17 5055.34,4244.44 5054.74,4244.83 5054.11,4245.33 5054.11,4224.67 5054.74,4225.17 5055.34,4225.56 5055.9,4225.83 5056.44,4226.01 5056.96,4226.1 5057.47,4226.12 5057.98,4226.07 5058.5,4225.98 5060.17,4225.54 5061.45,4225.23 5062.16,4225.11 5062.93,4225.03
  region net 1V2: 4731.81,4305 4731.81,4285 4732.65,4285.03 4733.42,4285.11 4734.13,4285.23 4735.4,4285.54 4737.07,4285.98 4737.59,4286.07 4738.1,4286.12 4738.61,4286.1 4739.14,4286.01 4739.68,4285.83 4740.24,4285.56 4740.83,4285.17 4741.46,4284.67 4741.46,4305.33 4740.83,4304.83 4740.24,4304.44 4739.68,4304.17 4739.14,4303.99 4738.61,4303.9 4738.1,4303.88 4737.59,4303.93 4737.07,4304.02 4735.4,4304.46 4734.13,4304.77 4733.42,4304.89 4732.65,4304.97
  region net 1V2: 4769.33,4285 4769.33,4305 4768.5,4304.97 4767.73,4304.89 4767.02,4304.77 4765.74,4304.46 4764.08,4304.02 4763.56,4303.93 4763.04,4303.88 4762.53,4303.9 4762.01,4303.99 4761.47,4304.17 4760.91,4304.44 4760.32,4304.83 4759.69,4305.33 4759.69,4284.67 4760.32,4285.17 4760.91,4285.56 4761.47,4285.83 4762.01,4286.01 4762.53,4286.1 4763.04,4286.12 4763.56,4286.07 4764.08,4285.98 4765.74,4285.54 4767.02,4285.23 4767.73,4285.11 4768.5,4285.03
  region net 1V2: 4628.76,4285 4628.76,4305 4627.3,4304.94 4624.72,4304.7 4623.55,4304.63 4622.99,4304.64 4622.44,4304.7 4621.89,4304.8 4621.34,4304.95 4620.79,4305.17 4620.24,4305.46 4619.68,4305.83 4619.11,4306.29 4619.11,4285.63 4619.98,4286.09 4621.08,4286.25 4622.34,4286.18 4623.69,4285.95 4627.68,4285.1
  region net 1V2: 4591.24,4305 4591.24,4285 4591.75,4285.03 4592.93,4285.2 4596.31,4285.95 4597.66,4286.18 4598.31,4286.24 4598.92,4286.25 4599.5,4286.2 4600.02,4286.09 4600.49,4285.9 4600.89,4285.63 4600.89,4306.29 4600.32,4305.83 4599.76,4305.46 4599.21,4305.17 4598.66,4304.95 4598.11,4304.8 4597.56,4304.7 4597.01,4304.64 4596.45,4304.63 4595.28,4304.7 4592.7,4304.94
  region net SPI_MOSI: 4091.6,4672.26 4091.6,4667.26 4092.26,4667.23 4092.84,4667.15 4093.37,4667.02 4093.84,4666.84 4094.28,4666.62 4094.67,4666.36 4095.04,4666.06 4095.39,4665.73 4096.07,4665 4097.55,4663.29 4098.49,4662.38 4098.49,4677.14 4097.55,4676.23 4096.07,4674.52 4095.39,4673.79 4095.04,4673.46 4094.67,4673.16 4094.28,4672.9 4093.84,4672.68 4093.37,4672.5 4092.84,4672.37 4092.26,4672.29
  region net SPI_CS: 4091.6,4640.76 4091.6,4635.76 4092.26,4635.73 4092.84,4635.65 4093.37,4635.52 4093.84,4635.34 4094.28,4635.12 4094.67,4634.86 4095.04,4634.56 4095.39,4634.23 4096.07,4633.5 4097.55,4631.79 4098.49,4630.88 4098.49,4645.64 4097.55,4644.73 4096.07,4643.02 4095.39,4642.29 4095.04,4641.96 4094.67,4641.66 4094.28,4641.4 4093.84,4641.18 4093.37,4641 4092.84,4640.87 4092.26,4640.79
  region net SPI_SCK: 4091.6,4577.77 4091.6,4572.77 4092.26,4572.74 4092.84,4572.66 4093.37,4572.53 4093.84,4572.35 4094.28,4572.13 4094.67,4571.87 4095.04,4571.57 4095.39,4571.24 4096.07,4570.51 4097.55,4568.8 4098.49,4567.89 4098.49,4582.65 4097.55,4581.74 4096.07,4580.03 4095.39,4579.3 4095.04,4578.97 4094.67,4578.67 4094.28,4578.41 4093.84,4578.19 4093.37,4578.01 4092.84,4577.88 4092.26,4577.8
  region net PE8: 4091.6,4546.28 4091.6,4541.28 4092.26,4541.25 4092.84,4541.17 4093.37,4541.04 4093.84,4540.86 4094.28,4540.64 4094.67,4540.38 4095.04,4540.08 4095.39,4539.75 4096.07,4539.02 4097.55,4537.31 4098.49,4536.4 4098.49,4551.16 4097.55,4550.25 4096.07,4548.54 4095.39,4547.81 4095.04,4547.48 4094.67,4547.18 4094.28,4546.92 4093.84,4546.7 4093.37,4546.52 4092.84,4546.39 4092.26,4546.31
  region net PE9: 4091.6,4609.27 4091.6,4604.27 4092.26,4604.24 4092.84,4604.16 4093.37,4604.03 4093.84,4603.85 4094.28,4603.63 4094.67,4603.37 4095.04,4603.07 4095.39,4602.74 4096.07,4602.01 4097.55,4600.3 4098.49,4599.39 4098.49,4614.15 4097.55,4613.24 4096.07,4611.53 4095.39,4610.8 4095.04,4610.47 4094.67,4610.17 4094.28,4609.91 4093.84,4609.69 4093.37,4609.51 4092.84,4609.38 4092.26,4609.3
  region net 3V3: 3820,4671.35 3810,4671.35 3809.98,4670.78 3809.91,4670.21 3809.8,4669.64 3809.66,4669.08 3809.47,4668.51 3809.02,4667.41 3808.46,4666.33 3807.81,4665.29 3807.11,4664.3 3805.99,4662.94 3824.01,4662.94 3822.89,4664.3 3822.19,4665.29 3821.54,4666.33 3820.98,4667.41 3820.53,4668.51 3820.34,4669.08 3820.2,4669.64 3820.09,4670.21 3820.02,4670.78
  region net LEDK: 3830,4858.99 3840,4858.99 3840.02,4859.55 3840.09,4860.08 3840.2,4860.6 3840.34,4861.1 3840.53,4861.58 3840.74,4862.05 3840.98,4862.5 3841.54,4863.39 3842.19,4864.24 3844.01,4866.34 3825.99,4866.34 3827.81,4864.24 3828.46,4863.39 3829.02,4862.5 3829.26,4862.05 3829.47,4861.58 3829.66,4861.1 3829.8,4860.6 3829.91,4860.08 3829.98,4859.55
  region net LEDK: 3840,4889.31 3830,4889.31 3829.98,4888.75 3829.91,4888.23 3829.8,4887.72 3829.66,4887.24 3829.47,4886.78 3829.26,4886.34 3829.02,4885.9 3828.46,4885.07 3827.81,4884.26 3825.99,4882.23 3844.01,4882.23 3842.19,4884.26 3841.54,4885.07 3840.98,4885.9 3840.74,4886.34 3840.53,4886.78 3840.34,4887.24 3840.2,4887.72 3840.09,4888.23 3840.02,4888.75
  region net RESET: 5538.92,4318.4 5533.92,4318.4 5533.89,4317.74 5533.81,4317.16 5533.68,4316.63 5533.5,4316.16 5533.28,4315.72 5533.02,4315.33 5532.72,4314.96 5532.39,4314.61 5531.65,4313.93 5529.95,4312.45 5529.04,4311.51 5543.8,4311.51 5542.89,4312.45 5541.18,4313.93 5540.44,4314.61 5540.12,4314.96 5539.82,4315.33 5539.56,4315.72 5539.34,4316.16 5539.16,4316.63 5539.03,4317.16 5538.95,4317.74
  region net RESET: 5562.71,4903.76 5566.24,4907.29 5565.8,4907.78 5565.44,4908.25 5565.16,4908.71 5564.95,4909.18 5564.8,4909.64 5564.71,4910.1 5564.66,4910.57 5564.64,4911.05 5564.69,4912.05 5564.84,4914.31 5564.82,4915.62 5554.38,4905.18 5555.69,4905.16 5557.95,4905.31 5558.95,4905.36 5559.43,4905.34 5559.9,4905.29 5560.36,4905.2 5560.82,4905.05 5561.29,4904.84 5561.75,4904.56 5562.22,4904.2
  region net KEYADC0: 5030.23,3741.24 5033.76,3744.77 5033.44,3745.32 5033.39,3745.98 5033.56,3746.71 5034.19,3748.3 5034.52,3749.11 5034.76,3749.89 5034.82,3750.62 5024.38,3740.18 5025.11,3740.24 5025.89,3740.48 5027.51,3741.15 5028.29,3741.44 5029.02,3741.61 5029.68,3741.56
  region net 1V8: 5307.87,4295 5297.87,4275 ccw(c5297.87,4343.17) 5317.87,4278 5320.72,4292 ccw(c5307.87,4265.94)
  region net 3V3: 3813.74,4242.06 3814.67,4242.03 3815.61,4241.94 3816.54,4241.8 3817.47,4241.61 3818.39,4241.36 3819.3,4241.07 3821.08,4240.34 3822.81,4239.43 3824.46,4238.37 3826.02,4237.15 3827.49,4235.81 3828.83,4234.34 3830.05,4232.78 3831.11,4231.13 3832.02,4229.4 3832.75,4227.62 3833.04,4226.71 3833.29,4225.79 3833.48,4224.86 3833.62,4223.93 3833.71,4222.99 3833.74,4222.06 3853.74,4222.06 3853.8,4223.93 3853.97,4225.92 3854.37,4228.7 3855.13,4232.37 3856.14,4236.18 3857.65,4240.86 3859.45,4245.55 3861.49,4250.14 3863.73,4254.51 3865.71,4257.92 3867.77,4261.05 3869.46,4263.3 3870.74,4264.83 3872.02,4266.2 3857.88,4280.34 3856.51,4279.06 3854.99,4277.78 3852.73,4276.09 3849.6,4274.03 3846.19,4272.05 3841.82,4269.81 3837.23,4267.77 3832.54,4265.97 3827.86,4264.46 3824.05,4263.45 3820.38,4262.69 3817.6,4262.29 3815.61,4262.12 3813.74,4262.06
  region net 1V8: 4457.86,4250.8 4437.86,4240.8 ccw(c4466.92,4240.8) 4440.86,4227.94 4454.86,4230.8 ccw(c4389.7,4250.8)
  region net 3V3: 4321.72,4350.86 4335.86,4336.72 4342.93,4357.93 4360,4395
  region net 3V3: 4785,5175 4805,5175 ccw(c4897.5,5175) 4810,5145 4780,5145 ccw(c4692.5,5175)
  region net 3V3: 4429.14,5123.28 4427.77,5122 4426.25,5120.72 4423.99,5119.03 4420.87,5116.97 4417.46,5114.99 4413.08,5112.76 4408.49,5110.71 4403.8,5108.91 4399.13,5107.4 4395.31,5106.39 4391.65,5105.63 4388.86,5105.23 4386.88,5105.06 4385,5105 4385,5085 4385.94,5084.97 4386.87,5084.89 4387.8,5084.74 4388.73,5084.55 4389.65,5084.31 4390.56,5084.01 4392.34,5083.28 4394.07,5082.38 4395.72,5081.31 4397.29,5080.1 4398.75,5078.75 4400.1,5077.29 4401.31,5075.72 4402.38,5074.07 4403.28,5072.34 4404.01,5070.56 4404.31,5069.65 4404.55,5068.73 4404.74,5067.8 4404.89,5066.87 4404.97,5065.94 4405,5065 4425,5065 4425.06,5066.88 4425.23,5068.86 4425.63,5071.65 4426.39,5075.31 4427.4,5079.13 4428.91,5083.8 4430.71,5088.49 4432.76,5093.08 4434.99,5097.46 4436.97,5100.87 4439.03,5103.99 4440.72,5106.25 4442,5107.77 4443.28,5109.14
  region net 3V3: 4405,5040.95 4425,5040.95 4424.97,5041.76 4424.9,5042.52 4424.67,5043.88 4424.26,5045.65 4424.16,5046.19 4424.09,5046.72 4424.07,5047.24 4424.1,5047.76 4424.21,5048.29 4424.39,5048.83 4424.67,5049.39 4425.05,5049.98 4425.55,5050.59 4404.88,5050.59 4405.4,5049.95 4405.79,5049.35 4406.06,5048.78 4406.23,5048.25 4406.3,5047.73 4406.3,5047.23 4406.24,5046.72 4406.12,5046.22 4405.61,5044.57 4405.26,5043.3 4405.12,5042.58 4405.03,5041.8
  region net 3V3: 4425,5078.47 4405,5078.47 4405.03,5077.61 4405.12,5076.83 4405.26,5076.12 4405.61,5074.84 4406.12,5073.2 4406.24,5072.69 4406.3,5072.19 4406.3,5071.68 4406.23,5071.16 4406.06,5070.63 4405.79,5070.06 4405.4,5069.46 4404.88,5068.82 4425.55,5068.82 4425.05,5069.44 4424.67,5070.02 4424.39,5070.58 4424.21,5071.12 4424.1,5071.65 4424.07,5072.17 4424.09,5072.69 4424.16,5073.22 4424.53,5074.91 4424.8,5076.19 4424.9,5076.9 4424.97,5077.65
  region net 1V2: 4900.86,4263.28 4886.72,4249.14 4907.93,4242.07 4945,4225
  region net +5V: 6095.33,5447.43 6084.93,5437.36 6080.23,5433.28 6076.08,5430.06 6072.52,5427.63 6069.6,5425.87 6066.59,5424.3 6064.28,5423.27 6061.92,5422.36 6059.51,5421.58 6057.03,5420.95 6054.5,5420.47 6051.9,5420.16 6049.23,5420.01 6048.33,5420 6048.33,5390 6059.12,5405 6116.55,5426.21
  region net 1V2: 4175.8,4241.33 4165.8,4261.33 ccw(c4165.8,4232.27) 4152.94,4258.33 4155.8,4244.33 ccw(c4175.8,4309.49)
  region net 1V2: 4628.76,4285 4628.76,4305 4627.3,4304.94 4624.72,4304.7 4623.55,4304.63 4622.99,4304.64 4622.44,4304.7 4621.89,4304.8 4621.34,4304.95 4620.79,4305.17 4620.24,4305.46 4619.68,4305.83 4619.11,4306.29 4619.11,4285.63 4619.98,4286.09 4621.08,4286.25 4622.34,4286.18 4623.69,4285.95 4627.68,4285.1
  region net 1V2: 4591.24,4305 4591.24,4285 4591.75,4285.03 4592.93,4285.2 4596.31,4285.95 4597.66,4286.18 4598.31,4286.24 4598.92,4286.25 4599.5,4286.2 4600.02,4286.09 4600.49,4285.9 4600.89,4285.63 4600.89,4306.29 4600.32,4305.83 4599.76,4305.46 4599.21,4305.17 4598.66,4304.95 4598.11,4304.8 4597.56,4304.7 4597.01,4304.64 4596.45,4304.63 4595.28,4304.7 4592.7,4304.94
  region net 3V3: 5946.72,4918.47 5948,4917.1 5949.28,4915.57 5950.97,4913.32 5953.03,4910.19 5955.01,4906.78 5957.24,4902.4 5959.29,4897.82 5961.09,4893.13 5962.6,4888.45 5963.61,4884.64 5964.37,4880.97 5964.77,4878.18 5964.94,4876.2 5965,4874.32 5965,4938.47 5964.98,4937.78 5964.84,4936.38 5964.71,4935.68 5964.55,4935.01 5964.36,4934.37 5964.13,4933.78 5963.88,4933.24 5963.6,4932.78 5963.28,4932.4 5962.94,4932.12 5962.58,4931.95 5962.18,4931.9 5961.76,4931.99 5961.32,4932.22 5960.86,4932.61
  region net 3V3: 5309.59,5080 5307.71,5080.06 5305.73,5080.23 5302.94,5080.63 5299.28,5081.39 5295.46,5082.4 5290.79,5083.91 5286.1,5085.71 5281.51,5087.76 5277.13,5089.99 5273.72,5091.97 5270.6,5094.03 5268.34,5095.72 5266.82,5097 5265.45,5098.28 5251.31,5084.14 5252.59,5082.77 5253.87,5081.25 5255.56,5078.99 5257.62,5075.87 5259.6,5072.46 5261.83,5068.08 5263.88,5063.49 5265.68,5058.8 5267.19,5054.13 5268.2,5050.31 5268.95,5046.65 5269.36,5043.86 5269.53,5041.88 5269.59,5040 5289.59,5040 5289.62,5040.94 5289.7,5041.87 5289.84,5042.8 5290.04,5043.73 5290.28,5044.65 5290.58,5045.56 5291.31,5047.34 5292.21,5049.07 5293.28,5050.72 5294.49,5052.29 5295.84,5053.75 5297.3,5055.1 5298.87,5056.31 5300.52,5057.38 5302.25,5058.28 5304.03,5059.01 5304.94,5059.31 5305.86,5059.55 5306.79,5059.74 5307.72,5059.89 5308.65,5059.97 5309.59,5060
  region net 3V3: 3842.17,4750.1 3843.23,4751.07 3844.42,4752.01 3845.72,4752.91 3847.12,4753.76 3849.38,4754.95 3851.77,4756.02 3854.25,4756.95 3856.77,4757.75 3859.29,4758.38 3861.75,4758.85 3864.11,4759.14 3865.6,4759.23 3866.31,4759.24 3866.31,4769.24 3865.62,4769.28 3864.92,4769.39 3864.26,4769.56 3863.7,4769.8 3863.28,4770.1 3863.05,4770.45 3863.07,4770.86 3863.38,4771.31
  region net LEDK: 3855,4895.23 3855,4885.23 ccw(c3855,4838.98) 3840,4882.73 3840,4897.73 ccw(c3855,4941.48)
  region net LEDK: 3855,4863.73 3855,4853.73 ccw(c3855,4807.48) 3840,4851.23 3840,4866.23 ccw(c3855,4909.98)

## Silkscreen, mask and mechanical layers (free items; w line width, h text height)
Top Silkscreen Layer:
  text "Allwinner V3S" at 3412.98,5826.1 h32.45
  text "20231217 V1" at 3415.83,5751.1 h32.45
  text "HOST 1" at 5363.66,5459.99 h29.2
  text "HOST 2" at 6173.66,5459.99 h29.2
  text "SD CARD" at 6442.38,5449.99 h29.2
  text "headphone" at 4193.68,5386.1 h32.45
  text "RTL8723BS" at 4043.9,5163.68 h32.45 r90
  text "CH334R" at 5505.01,5153.24 h29.2 r90
  text "10/100M ETH" at 6317.25,4689.99 h29.2
  text "JLCJLCJLCJLC" at 4617.72,4503.74 h25.55
  text "CH340" at 3988.9,4359.38 h32.45 r90
  text "V3S" at 5042.23,4331.1 h32.45
  text "3V3" at 3642.23,4236.1 h32.45
  text "1V2" at 3974.65,4236.1 h32.45
  text "1V8" at 4274.37,4236.1 h32.45
  text "RST" at 5512.23,4040.59 h32.45
  text "PB1 PB3 PB5 3V3 3V3 PB7 GND GND" at 5397.33,3896.1 h32.45
  text "PB0 PB2 PB4 GND GND PB6 5V 5V" at 5400.18,3811.1 h32.45

## Text inside footprints (layer, text, board x,y; h text height)
LCD1: Bottom Silkscreen Layer "1" at 4099.62,4500 h30.88 r270; Bottom Silkscreen Layer "18" at 4099.51,5021.27 h30.66 r270